# EAGLE board LPmini-Prototype_1.3_bga (EAGLE 6.4)
REV: B
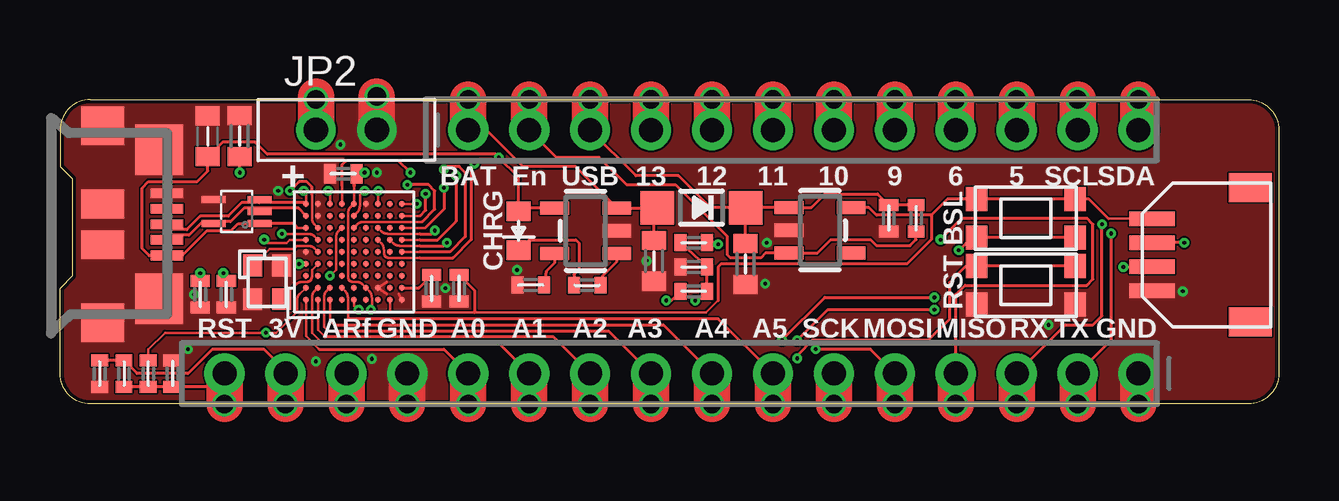
[diagram p0: board, top side]
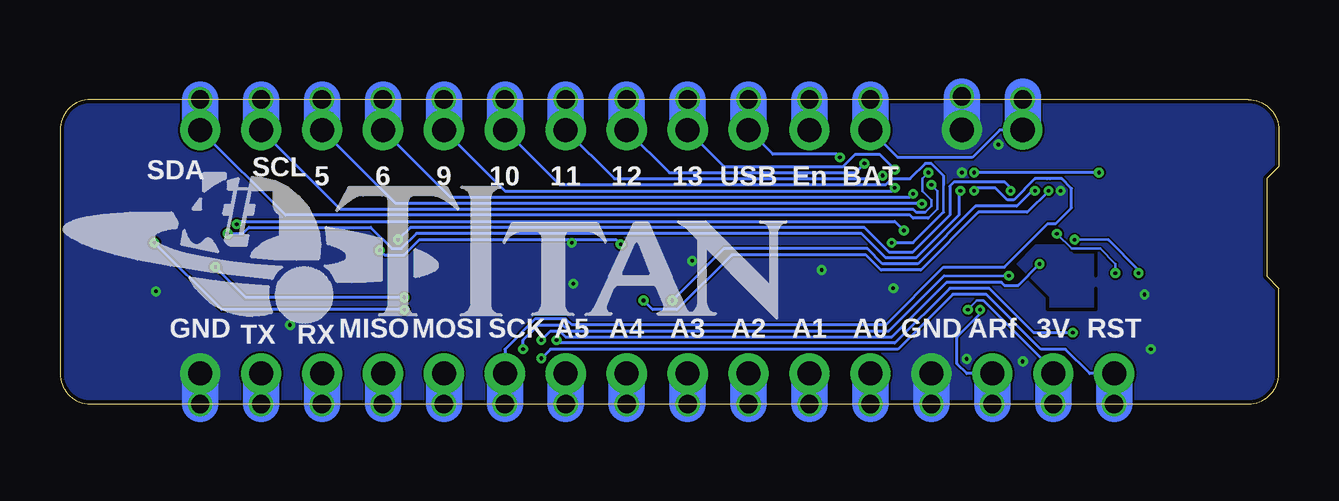
[diagram p1: board, bottom side, seen from below]

Size 50.8 x 12.7 mm. Coordinates in mm from the lower left corner, seen from the top.
Outline: 1.27,12.7 49.53,12.7 arc-90 50.8,11.43 50.8,1.27 arc-90 49.53,0 1.27,0 arc-90 0,1.27 0,4.83 0.51,5.33 0.51,9.4 0,9.91 0,11.43 arc-90 1.27,12.7
Copper layers (1*16): Top 0.0356mm / dielectric 1.5011mm / Bottom 0.0356mm
Design rules "Joseph *": minimum track width 3mil, minimum drill 6mil, track to track 3mil, track to pad 3mil, pad to pad 3mil, via to via 3mil, smd to smd 0mil, copper to edge 6mil, drill to drill 6mil, minimum pad ring 5mil, minimum via ring 5mil, stop-mask expansion 1mil, vias tented up to drill 50mil, thermal gap 6mil
bRestrict: 9 lines
vRestrict: 12 lines

## Footprints (pad centres in the part's own frame; a part is rotated, then mirrored left to right if it is on the bottom)
PB_KMR2 = smd 0.9 x 1: 1A -2.05,0.8; 1B 2.05,0.8; 2A -2.05,-0.8; 2B 2.05,-0.8
C0402 = smd 0.5 x 0.8: 1 -0.55,0; 2 0.55,0
R0603 = smd 0.8 x 1: 1 -0.85,0; 2 0.85,0
R0402 = smd 0.5 x 0.7: 1 -0.55,0; 2 0.55,0
C0603 = smd 0.8 x 1: 1 -0.85,0; 2 0.85,0
LED_0603 = smd 0.8 x 1: A -0.813,0; K 0.813,0
SOD-123 = smd 1.4 x 1.4: A 1.85,0; C -1.85,0
1X16_ROUND = drill 1 pad 1.676: 1 -19.05,0; 2 -16.51,0; 3 -13.97,0; 4 -11.43,0; 5 -8.89,0; 6 -6.35,0; 7 -3.81,0; 8 -1.27,0; 9 1.27,0; 10 3.81,0; 11 6.35,0; 12 8.89,0; 13 11.43,0; 14 13.97,0; 15 16.51,0; 16 19.05,0
0_JOSEPH_1X02-END = drill 1.016 pad 1.651: 1 -1.27,0; 2 1.27,0
1X12_ROUND = drill 1 pad 1.676: 1 -13.97,0; 2 -11.43,0; 3 -8.89,0; 4 -6.35,0; 5 -3.81,0; 6 -1.27,0; 7 1.27,0; 8 3.81,0; 9 6.35,0; 10 8.89,0; 11 11.43,0; 12 13.97,0
SOT23-5 = smd 0.55 x 1.2: 1 -0.95,-1.3; 2 0,-1.3; 3 0.95,-1.3; 4 0.95,1.3; 5 -0.95,1.3
PROJECT7264_TPD2E001-DRL = smd 0.3 x 1: 1 -0.5,-0.95; 2 0,-0.95; 3 0.5,-0.95; 4 0.5,0.95; 5 -0.5,0.95
MOLEX_4_1MM = smd 0.6 x 1.9: 1 1.5,-0.2; 2 0.5,-0.2; 3 -0.5,-0.2; 4 -1.5,-0.2 | smd 1.2 x 1.8: P$1 -2.8,3.9; P$2 2.8,3.9
80_BGA_MICROSTAR = smd 0.24 x 0.24: A1 -2,2; A2 -1.5,2; A3 -1,2; A4 -0.5,2; A5 0,2; A6 0.5,2; A7 1,2; A8 1.5,2; A9 2,2; B1 -2,1.5; B2 -1.5,1.5; B3 -1,1.5; B4 -0.5,1.5; B5 0,1.5; B6 0.5,1.5; B7 1,1.5; B8 1.5,1.5; B9 2,1.5; C1 -2,1; C2 -1.5,1; C4 -0.5,1; C5 0,1; C6 0.5,1; C7 1,1; C8 1.5,1; C9 2,1; D1 -2,0.5; D2 -1.5,0.5; D3 -1,0.5; D4 -0.5,0.5; D5 0,0.5; D6 0.5,0.5; D7 1,0.5; D8 1.5,0.5; D9 2,0.5; E1 -2,0; E2 -1.5,0; E3 -1,0; E4 -0.5,0; E5 0,0; E6 0.5,0; E7 1,0; E8 1.5,0; E9 2,0; F1 -2,-0.5; F2 -1.5,-0.5; F3 -1,-0.5; F4 -0.5,-0.5; F5 0,-0.5; F6 0.5,-0.5; F7 1,-0.5; F8 1.5,-0.5; F9 2,-0.5; G1 -2,-1; G2 -1.5,-1; G3 -1,-1; G4 -0.5,-1; G5 0,-1; G6 0.5,-1; G7 1,-1; G8 1.5,-1; G9 2,-1; H1 -2,-1.5; H2 -1.5,-1.5; H3 -1,-1.5; H4 -0.5,-1.5; H5 0,-1.5; H6 0.5,-1.5; H7 1,-1.5; H8 1.5,-1.5; H9 2,-1.5; J1 -2,-2; J2 -1.5,-2; J3 -1,-2; J4 -0.5,-2; J5 0,-2; J6 0.5,-2; J7 1,-2; J8 1.5,-2; J9 2,-2
SMD_CRYSTAL = smd 0.9 x 0.8: 1 -0.7,-0.6; 2 0.7,-0.6; 3 0.7,0.6; 4 -0.7,0.6
USB_CON-UPDATE_HIROSE-ZX62R-B-5P = smd 1.35 x 0.4: D+ 2.675,0; D- 2.675,-0.65; GND 2.675,1.3; NC 2.675,0.65; VBUS 2.675,-1.3 | smd 1.778 x 1.6: SHIELD1 0,4.1; SHIELD2 0,-4.1 | smd 2 x 2.1: SHIELD3 2.35,3.1; SHIELD4 2.35,-3.1 | smd 1.778 x 1.2: SHIELD5 0,0.85; SHIELD6 0,-0.85

## Placement (x,y rotation side)
BSL  PB_SMALL_SMD  [PB_KMR2]  40.26,7.75 0 top
C1  .1uF  [C0402]  34.54,7.75 270 top
C3  10µF  [R0603]  24.77,5.97 270 top
C6  10µF  [R0603]  28.57,5.84 270 top
C7  1uF  [R0402]  1.65,1.27 270 top
C8  10µF  [R0603]  7.49,11.18 90 top
C19  .1uF  [C0402]  4.7,1.27 90 top
C21  .1uF  [C0402]  11.81,9.6 180 top
C22  .1uF  [C0402]  16.64,4.83 270 top
C24  10uF  [C0603]  6.16,11.16 90 top
C25  .1uF  [C0402]  5.84,4.57 270 top
C26  .1uF  [C0402]  6.93,4.57 270 top
C28  .1uF  [C0402]  15.49,4.83 270 top
CHG  ORANGE  [LED_0603]  19.12,7.23 270 top
D4  MBR120  [SOD-123]  26.74,8.19 180 top
JP1  [1X16_ROUND]  25.91,1.27 180 top
JP2  [0_JOSEPH_1X02-END]  11.94,11.43 0 top
JP3  [1X12_ROUND]  30.99,11.43 0 top
R1  1.4k  [R0402]  26.42,4.7 180 top
R2  1K  [R0402]  21.97,4.95 0 top
R3  1M  [R0402]  26.42,5.71 0 top
R4  1k  [R0402]  3.68,1.27 90 top
R5  100  [R0402]  26.42,6.73 0 top
R7  22k  [R0402]  2.67,1.27 270 top
R8  10K  [R0402]  19.62,4.96 180 top
R9  100k  [R0402]  35.69,7.75 270 top
RST  PB_SMALL_SMD  [PB_KMR2]  40.26,4.95 180 top
U2  SPX3819-3.3  [SOT23-5]  31.68,7.25 270 top
U3  MCP73831T-2ACI/OT  [SOT23-5]  21.91,7.23 90 top
U4  ESD_TPD2E001  [PROJECT7264_TPD2E001-DRL]  7.37,8.03 90 top
U$2  PINHD_1X4MOLEX_4_1MM  [MOLEX_4_1MM]  45.72,6.22 270 top
U$4  MSP430F5528  [80_BGA_MICROSTAR]  12.25,6.35 90 top
U$5  CRYSTAL_SMD  [SMD_CRYSTAL]  8.64,5.08 270 top
U$7  [TITAN_LOGO]  34.29,5.97 0 bottom
USB1  [USB_CON-UPDATE_HIROSE-ZX62R-B-5P]  1.78,7.49 0 top

## Library data of the parts
BSL CHG JP2 RST U4 U$2 U$4 U$5 U$7 USB1 = 0Joseph
C1 C3 C6 C7 C19 C21 C22 C24-C26 C28 R1-R5 R7-R9 = rcl
C8 = rcl; COMPANY: ADAFRUIT INDUSTRIES; DRAWN: KTOWN; REV: A
D4 JP1 JP3 U2 U3 = microbuilder

## Nets
5: JP3.10 U$4.J9
6: JP3.9 U$4.J8
9: JP3.8 U$4.J7
10: JP3.7 U$4.H6
11: JP3.6 U$4.J6
12: JP3.5 U$4.G6
13: JP3.4 U$4.J5
A0: JP1.12 U$4.A1
A1: JP1.11 U$4.B2
A2: JP1.10 U$4.B1
A3: JP1.9 U$4.C2
A4: JP1.8 U$4.C1
A5: JP1.7 U$4.D2
B0_SCL: U$4.H9
B0_SDA: U$4.H8
B1_SCK: U$4.D8
D_N: U4.2 U4.5 U$4.A8 USB1.D-
D_P: R1.2 U4.3 U$4.A9 USB1.D+
EN: JP3.2 R9.2 U2.3
GND: C1.2 C3.2 C6.2 C7.2 C8.2 C19.2 C21.2 C22.2 C24.2 C25.2 C26.2 C28.2 JP1.1 JP1.13 JP2.2 R3.1 R8.2 RST.1A RST.1B U2.2 U3.2 U4.4 U$2.1 U$4.A5 U$4.B8 U$4.B9 U$4.F9 U$4.G2 U$4.J1 U$5.2 U$5.4 USB1.GND USB1.SHIELD1 USB1.SHIELD2 USB1.SHIELD3 USB1.SHIELD4 USB1.SHIELD5 USB1.SHIELD6
MISO: JP1.4 U$4.C9
MOSI: JP1.5 U$4.D7
N$1: CHG.K R2.1
N$3: R2.2 U3.1
N$4: R8.1 U3.5
N$5: BSL.2A BSL.2B R5.2
N$6: R1.1 R3.2 R5.1 U$4.B7
N$11: U$2.3 U$4.A4
N$12: U$4.B5 U$5.1
N$14: U$4.B4 U$5.3
N$23: C25.1 U$4.A6
N$24: C26.1 U$4.B6
N$25: C28.1 U$4.J2
RST: R4.2 U$2.2 U$4.A2
RST_BTN: C19.1 JP1.16 R4.1 R7.2 RST.2A RST.2B
RX: JP1.3 U$4.G7
SCK: JP1.6 U$4.E8
SCL: JP3.11 U$4.D9
SDA: JP3.12 U$4.E7
TX: JP1.2 U$4.G9
VBAT: C3.1 D4.A JP2.1 JP3.1 U3.3
VBUS: C1.1 C6.1 C24.1 CHG.A D4.C JP3.3 R9.1 U2.1 U3.4 U4.1 U$4.A7 USB1.VBUS
VCC: BSL.1A BSL.1B C7.1 C8.1 C21.1 C22.1 JP1.15 R7.1 U2.5 U$2.4 U$4.E9 U$4.F2 U$4.H1
VREF+: JP1.14 U$4.E1

## Tracks (layer width: path | path; a pad name or v marks a point on that pad's centre or on a via)
5  (via drill 0.15, 0.76)
  Top 0.102: U$4.J9 v14.88,8.35
  Top 1.524: JP3.10 v39.88,12.7
  Bottom 0.102: v14.88,8.35 14.91,8.38
  Bottom 0.127: JP3.10 36.83,8.38 14.91,8.38
  Bottom 1.524: JP3.10 v39.88,12.7
6  (via drill 0.15, 0.76)
  Top 0.102: U$4.J8 15,7.85
  Top 0.127: 15,7.85 15.24,8.09 v15.24,8.76
  Top 1.524: JP3.9 v37.34,12.7
  Bottom 0.127: JP3.9 34.54,8.64 15.37,8.64 v15.24,8.76
  Bottom 1.524: JP3.9 v37.34,12.7
9  (via drill 0.15, 0.76)
  Top 0.102: U$4.J7 15.22,7.35
  Top 0.127: v16,9.02 16,8.13 15.22,7.35
  Top 1.524: JP3.8 v34.8,12.7
  Bottom 0.127: JP3.8 32.26,8.89 16.13,8.89 v16,9.02
  Bottom 1.524: JP3.8 v34.8,12.7
10  (via drill 0.15, 0.76)
  Top 0.102: U$4.H6 13.88,6.72 arc45 14.17,6.6 15,6.6
  Top 0.127: 15,6.6 16,6.6 v16.13,6.73
  Top 1.524: JP3.7 v32.26,12.7
  Bottom 0.102: 13.97,8 13.97,9.14
  Bottom 0.127: JP3.7 29.97,9.14 16.38,9.14 16.13,9.4 15.37,9.4 14.73,10.03 14.48,10.03 13.97,9.52 13.97,9.14 | v16.13,6.73 15.24,6.73 13.97,8
  Bottom 1.524: JP3.7 v32.26,12.7
11  (via drill 0.15, 0.76)
  Top 0.102: U$4.J6 15,6.85
  Top 0.127: 15,6.85 15.74,6.85 16.51,7.62 v16.51,9.52
  Top 1.524: JP3.6 v29.72,12.7
  Bottom 0.127: JP3.6 27.69,9.4 16.64,9.4 v16.51,9.52
  Bottom 1.524: JP3.6 v29.72,12.7
12  (via drill 0.15, 0.76)
  Top 0.102: U$4.G6 13.38,6.72 arc-45 13.5,6.43 13.5,6.3 arc90 13.7,6.1 15,6.1
  Top 0.127: v17.27,10.03 17.14,9.91 17.14,6.86 16.38,6.1 15,6.1
  Top 1.524: JP3.5 v27.18,12.7
  Bottom 0.127: JP3.5 25.4,9.65 17.65,9.65 v17.27,10.03
  Bottom 1.524: JP3.5 v27.18,12.7
13  (via drill 0.15, 0.76)
  Top 0.102: 15,6.35 U$4.J5
  Top 0.127: 15,6.35 16.26,6.35 16.89,6.98 16.89,9.65 16.64,9.91 16.13,9.91 v16,9.78
  Top 1.524: JP3.4 v24.64,12.7
  Bottom 0.127: JP3.4 23.11,9.91 18.16,9.91 17.65,10.41 16.64,10.41 v16,9.78
  Bottom 1.524: JP3.4 v24.64,12.7
A0  (via drill 0.76)
  Top 0.102: U$4.A1 10.25,2.85 10.79,2.29
  Top 0.127: 10.79,2.29 16,2.29 JP1.12
  Top 1.524: JP1.12 v17.02,0
  Bottom 1.524: JP1.12 v17.02,0
A1  (via drill 0.76)
  Top 0.102: U$4.B2 10.62,4.72 arc45 10.5,4.43 10.5,2.97 10.92,2.54
  Top 0.127: JP1.11 18.29,2.54 10.92,2.54
  Top 1.524: JP1.11 v19.56,0
  Bottom 1.524: JP1.11 v19.56,0
A2  (via drill 0.76)
  Top 0.102: U$4.B1 10.75,3.1 11.05,2.79
  Top 0.127: JP1.10 20.57,2.79 11.05,2.79
  Top 1.524: JP1.10 v22.1,0
  Bottom 1.524: JP1.10 v22.1,0
A3  (via drill 0.76)
  Top 0.102: U$4.C2 11.12,4.72 arc45 11,4.43 11,3.22 11.18,3.05
  Top 0.127: JP1.9 22.86,3.05 11.18,3.05
  Top 1.524: JP1.9 v24.64,0
  Bottom 1.524: JP1.9 v24.64,0
A4  (via drill 0.76)
  Top 0.102: U$4.C1 11.25,3.47 11.43,3.3
  Top 0.127: 11.43,3.3 25.15,3.3 JP1.8
  Top 1.524: JP1.8 v27.18,0
  Bottom 1.524: JP1.8 v27.18,0
A5  (via drill 0.76)
  Top 0.102: 12.01,3.56 12,4.44 arc45 11.88,4.72 U$4.D2
  Top 0.127: 12.01,3.56 27.43,3.56 JP1.7
  Top 1.524: JP1.7 v29.72,0
  Bottom 1.524: JP1.7 v29.72,0
D_N
  Top 0.127: 8.31,8.17 7.67,8.17 7.11,7.61 6.4,7.61 | 6.4,7.61 5.94,7.61 5.38,7.05 4.66,7.05 USB1.D- | U4.2 8.32,8.16 8.31,8.17 | U4.5 6.42,7.59 6.4,7.61 | U$4.A8 9.95,8.17 8.31,8.17
D_P  (via drill 0.15)
  Top 0.102: U$4.A9 10.25,8.8 v10.16,8.89
  Top 0.127: 8.31,8.39 7.57,8.39 7.01,7.84 5.84,7.84 5.29,7.28 4.67,7.28 USB1.D+ | U4.3 8.32,8.4 8.31,8.39 | U$4.A9 10.18,8.39 8.31,8.39 | v25.27,4.32 25.48,4.32 R1.2
  Bottom 0.127: v10.16,8.89 10.29,8.89 10.92,8.25 12.64,8.25 15.05,5.84 16.51,5.84 17.14,6.48 23.11,6.48 v25.27,4.32
EN  (via drill 0.76)
  Top 0.127: R9.2 35.69,6.86 35.43,6.6 34.04,6.6 33.78,6.86 32.13,6.86 31.57,6.3 U2.3 29.41,6.3 29.21,6.1 27.94,6.1 27.81,6.22 27.81,6.98 25.65,9.14 23.62,9.14 22.48,10.29 20.7,10.29 JP3.2
  Top 1.524: JP3.2 v19.56,12.7
  Bottom 1.524: JP3.2 v19.56,12.7
GND  (via drill 0.15, 0.76)
  Top 0.102: 13.62,4.6 U$4.G2 13.62,5.1 | 14.12,4.6 U$4.J1
  Top 1.524: JP1.13 v14.48,0 | JP1.1 v44.96,0 | JP2.2 v13.21,12.83
  Bottom 1.524: JP1.13 v14.48,0 | JP1.1 v44.96,0 | JP2.2 v13.21,12.83
  other vias: 5.33,2.29 19.05,5.59 16.07,4.83 29.46,6.73 29.4,5.02 13.21,9.65 24.45,5.97 46.8,4.7 41.21,3.3 5.59,4.57 10.67,1.78 13,1.88 11.68,10.82 9.09,8.89
  pour Bottom (no thermals): 0,0 50.8,0 50.8,12.7 0,12.7
  pour Top (no thermals): 14.76,8.85 9.76,8.85 9.76,3.85 14.76,3.85
  pour Top (no thermals): 0,12.7 0,0 50.8,0 50.8,12.7
MISO  (via drill 0.15, 0.76)
  Top 0.102: U$4.C9 11.25,8.85 v11.18,8.89
  Top 0.127: JP1.4 37.34,4.57 37.72,4.95 42.8,4.95 43.05,5.21 43.05,7.49 42.8,7.75 37.59,7.75 v36.7,6.86
  Top 1.524: JP1.4 v37.34,0
  Bottom 0.102: v11.18,8.89 11.18,9.02
  Bottom 0.127: 11.18,9.02 11.43,9.27 13.53,9.27 13.72,9.08 13.72,7.87 15.24,6.35 16.26,6.35 17.27,7.37 36.2,7.37 v36.7,6.86
  Bottom 1.524: JP1.4 v37.34,0
MOSI  (via drill 0.15, 0.76)
  Top 0.102: U$4.D7 11.62,7.22 arc45 11.5,6.93 11.5,5.6 v11.25,5.35
  Top 0.127: JP1.5 33.78,2.29 v31.5,2.29
  Top 1.524: JP1.5 v34.8,0
  Bottom 0.102: 13.95,5.35 v11.25,5.35
  Bottom 0.127: 13.95,5.35 16.26,3.05 29.59,3.05 29.84,3.3 30.86,3.3 31.5,2.67 v31.5,2.29
  Bottom 1.524: JP1.5 v34.8,0
N$1
  Top 0.127: CHG.K 19.55,6.85 21.5,6.85 21.62,6.72 21.62,5.6 21.42,5.4 R2.1
N$3
  Top 0.127: R2.2 22.62,5.35 23.21,5.94 U3.1
N$4
  Top 0.127: U3.5 20.61,5.88 20.27,5.54 R8.1
N$5  (via drill 0.15)
  Top 0.127: BSL.2B BSL.2A 38,6.95 v37.47,6.41 | v27.43,6.67 27.37,6.73 R5.2
  Bottom 0.127: v37.47,6.41 37.27,6.22 36.45,6.22 35.81,6.86 27.62,6.86 v27.43,6.67
N$6  (via drill 0.15)
  Top 0.102: U$4.B7 10.62,7.48 arc-45 10.5,7.77 10.5,8.72
  Top 0.127: R1.1 R3.2 R5.1 | 10.5,8.72 10.5,9.06 10.29,9.27 9.97,9.27 v9.59,8.89 | 26.97,4.55 R1.1 | v26.48,4.32 26.59,4.32 R1.1
  Bottom 0.127: v9.59,8.89 10.48,8 12.51,8 14.92,5.59 16.57,5.59 17.21,6.22 22.8,6.22 25.08,3.94 26.1,3.94 v26.48,4.32
N$11  (via drill 0.15)
  Top 0.102: U$4.A4 v9.97,5.84
  Top 0.127: v30.73,2.67 32,3.94 v36.45,3.94 | v46.86,6.73 45.53,6.73 U$2.3
  Bottom 0.127: v30.73,2.67 30.35,3.05 29.97,3.05 29.72,2.79 16.13,2.79 13.84,5.08 11.56,5.08 11.43,4.95 10.86,4.95 v9.97,5.84 | v36.45,3.94 44.07,3.94 v46.86,6.73
N$12
  Top 0.102: U$4.B5 10.62,6.48 arc45 10.33,6.6 9.88,6.6 9.75,6.47 8.73,6.47 U$5.1
N$14
  Top 0.102: U$5.3 9.84,4.98 arc-45 10.12,5.1 10.3,5.1 arc90 10.5,5.3 10.5,5.6 U$4.B4
N$23  (via drill 0.15)
  Top 0.102: U$4.A6 9.56,6.85 9.44,6.72 8.62,6.72 v8.51,6.86 | v5.84,5.46 C25.1
  Bottom 0.102: v8.51,6.86 7.11,6.86
  Bottom 0.127: 7.11,6.86 5.84,5.59 v5.84,5.46
N$24  (via drill 0.15)
  Top 0.102: U$4.B6 10.62,6.98 arc45 10.33,7.1 v9.25,7.1 | C26.1 v6.81,5.46
  Bottom 0.102: v9.25,7.1 8.62,6.48 7.44,6.48 6.81,5.84 v6.81,5.46
N$25
  Top 0.127: U$4.J2 14.97,4.85 C28.1
RST  (via drill 0.15)
  Top 0.102: U$4.A2 9.99,4.59 arc45 9.88,4.31 9.88,3.85 9,2.97 v8.58,2.97 4.38,2.97 3.68,2.28 R4.2
  Top 0.127: v30.1,2.67 31.88,4.44 v36.45,4.44 | v44.32,5.71 U$2.2
  Bottom 0.127: v8.58,2.97 10.21,2.97 12.06,4.83 13.72,4.83 16,2.54 30.1,2.54 v30.1,2.67 | v36.45,4.44 43.05,4.44 v44.32,5.71
RST_BTN  (via drill 0.15, 0.76)
  Top 0.127: JP1.16 6.31,0.72 C19.1 R4.1 R7.2 | RST.2A RST.2B 37.76,5.75 37.08,5.08 37.08,3.56 36.2,2.67 31.37,2.67 30.73,2.03 v30.73,1.9
  Top 1.524: JP1.16 v6.86,0
  Bottom 0.127: JP1.16 7.87,1.27 8.89,2.29 9.91,2.29 12.19,4.57 13.59,4.57 15.88,2.29 30.35,2.29 v30.73,1.9
  Bottom 1.524: JP1.16 v6.86,0
RX  (via drill 0.15, 0.76)
  Top 0.102: U$4.G7 13.38,7.22 arc45 13.67,7.1 15,7.1
  Top 0.127: 15,7.1 15.48,7.1 v15.62,7.24 | JP1.3 41.91,3.3 43.05,3.3 43.43,3.68 v43.43,7.49
  Top 1.524: JP1.3 v39.88,0
  Bottom 0.127: v15.62,7.24 16,7.62 43.31,7.62 v43.43,7.49
  Bottom 1.524: JP1.3 v39.88,0
SCK  (via drill 0.15, 0.76)
  Top 0.102: U$4.E8 12.38,7.98 arc45 12.5,8.27 12.5,8.72 v12.7,8.89
  Top 1.524: JP1.6 v32.26,0
  Bottom 0.127: JP1.6 32.26,2.29 30.99,3.56 29.72,3.56 29.46,3.3 16.38,3.3 13.97,5.71 11.43,5.71 9.63,7.52 9.3,7.52 8.64,8.18 8.64,8.99 9.04,9.4 9.53,9.4 9.65,9.4 10.16,9.4 11.05,8.51 11.3,8.51 11.81,9.02 12.57,9.02 v12.7,8.89
  Bottom 1.524: JP1.6 v32.26,0
SCL  (via drill 0.15, 0.76)
  Top 0.102: U$4.D9 11.76,9.1
  Top 0.127: v14.61,9.65 14.1,10.16 11.94,10.16 11.76,9.98 11.76,9.1
  Top 1.524: JP3.11 v42.42,12.7
  Bottom 0.102: 14.73,8 14.48,8.25 14.48,8.51 14.86,8.89 14.86,9.4 v14.61,9.65
  Bottom 0.127: JP3.11 39.12,8.13 15.24,8.13 15.11,8 14.73,8
  Bottom 1.524: JP3.11 v42.42,12.7
SDA  (via drill 0.15, 0.76)
  Top 0.102: U$4.E7 12.38,7.48 arc-45 12.67,7.6 15.09,7.6
  Top 0.127: 15.09,7.6 15.62,8.13 15.62,8.89 15.37,9.14 v14.48,9.14
  Top 1.524: JP3.12 v44.96,12.7
  Bottom 0.102: v14.48,9.14 14.22,8.89 14.22,8.13 14.61,7.75
  Bottom 0.127: JP3.12 41.4,7.87 15.37,7.87 15.24,7.75 14.61,7.75
  Bottom 1.524: JP3.12 v44.96,12.7
TX  (via drill 0.15, 0.76)
  Top 0.102: U$4.G9 13.25,8.8 v13.27,8.89
  Top 0.127: JP1.2 43.81,2.67 v43.81,7.11
  Top 1.524: JP1.2 v42.42,0
  Bottom 0.127: v43.81,7.11 43.18,7.11 42.93,7.37 37.85,7.37 36.96,6.48 36.58,6.48 35.94,7.11 17.4,7.11 16.38,6.1 15.11,6.1 13.34,7.87 13.34,8.83 v13.27,8.89
  Bottom 1.524: JP1.2 v42.42,0
VBAT  (via drill 0.76)
  Top 0.127: C3.1 24.77,8.07 D4.A 24.87,8.18 U3.3 21.48,9.91 19.3,9.91 17.78,11.43 JP3.1
  Top 1.524: JP2.1 v10.67,12.7 10.67,12.83 | JP3.1 v17.02,12.7
  Bottom 0.127: JP3.1 15.88,10.29 12.78,10.29 11.63,11.43 JP2.1
  Bottom 1.524: JP2.1 v10.67,12.7 10.67,12.83 | JP3.1 v17.02,12.7
VBUS  (via drill 0.15, 0.76)
  Top 0.102: U$4.A7 9.88,7.35
  Top 0.127: U3.4 19.25,8.18 CHG.A 19.12,9.46 v18.29,10.29 18.16,10.41 8.64,10.41 8.13,10.92 6.77,10.92 C24.1 6.16,9.72 5.71,9.27 3.68,9.27 3.43,9.02 3.43,6.48 3.71,6.19 USB1.VBUS 5.1,6.19 6.13,7.23 7.13,7.23 7.43,7.53 U4.1 9.73,7.53 9.88,7.35 | 28.7,8.2 U2.1 31.32,8.2 31.88,8.76 34.08,8.76 C1.1 R9.1 | 28.7,8.2 D4.C | D4.C | D4.C 27.11,8.2 25.78,9.52 24,9.52 JP3.3 | C6.1 28.57,8.07 28.7,8.2
  Top 1.524: JP3.3 v22.1,12.7
  Bottom 0.127: v18.29,10.29 18.41,10.41 21.08,10.41 JP3.3
  Bottom 1.524: JP3.3 v22.1,12.7
VCC  (via drill 0.15, 0.76)
  Top 0.102: 13,3.97 13,4.43 arc45 12.88,4.72 U$4.F2 12.62,4.98 arc45 12.33,5.1 12.2,5.1 arc-90 12,5.3 12,7.93 arc-45 12.12,8.22 U$4.E9 12.25,9.1 | 13,3.97 v12.95,3.94 | C21.1 v12.7,9.65 | 13,3.97 13.16,3.81 13.75,3.81 | 13.75,3.81 17.27,3.81 26.92,3.81 27.43,4.32 | U$4.H1 13.75,3.81
  Top 0.127: C7.1 R7.1 3.22,1.27 5.33,1.27 6.35,2.29 8.51,2.29 9.4,1.4 JP1.15 | U$2.4 43.7,7.73 42.89,8.55 BSL.1B BSL.1A 36.99,8.55 36.32,7.87 | 36.32,7.87 34.04,7.87 33.71,8.2 U2.5 | v7.49,9.65 C8.1 | 36.32,7.87 36.32,6.86 35.31,5.84 27.56,5.84 27.43,5.71 27.43,4.32 | C22.1 17.27,4.74 17.27,3.81
  Top 0.152: 12.25,9.1 12.25,9.47 C21.1
  Top 1.524: JP1.15 v9.4,0
  Bottom 0.102: v12.95,3.94 12.57,4.32 12.32,4.32 | 9.4,1.4 JP1.15
  Bottom 0.127: 12.32,4.32 9.4,1.4 | v7.49,9.65 v12.7,9.65
  Bottom 1.524: JP1.15 v9.4,0
VREF+  (via drill 0.15, 0.76)
  Top 0.102: U$4.E1 12.25,4.1 v12.45,3.94
  Top 1.524: JP1.14 v11.94,0
  Bottom 0.127: JP1.14 13.01,1.27 13.41,1.68 13.41,2.79 12.45,3.76 v12.45,3.94
  Bottom 1.524: JP1.14 v11.94,0

## Text on the board
tPlace: + | BAT | En | USB | 13 | 12 | 11 | 10 | 9 | 6 | 5 | SCL | SDA | CHRG | BSL | RST | RST | 3V | ARf | GND | A0 | A1 | A2 | A3 | A4 | A5 | SCK | MOSI | MISO | RX | TX | GND
bPlace: SCL | BAT | En | USB | 13 | 12 | 11 | 10 | 9 | 6 | 5 | SDA | RST | 3V | ARf | GND | A0 | A1 | A2 | A3 | A4 | A5 | SCK | MOSI | MISO | RX | TX | GND